# Altium PCB SOM_Codec_WM8731.PcbDoc (part 2 of 2)
Units mm, origin at the board's own origin, x right, y up, seen from the top; angles counter-clockwise.
Board outline 137 x 91.68 mm, 4 copper layers (Top Layer, Mid-Layer 1, Mid-Layer 3, Bottom Layer); 135 components, 119 nets, 648 pads, 240 vias.
Unrouted connection lines stored in the file: 116.
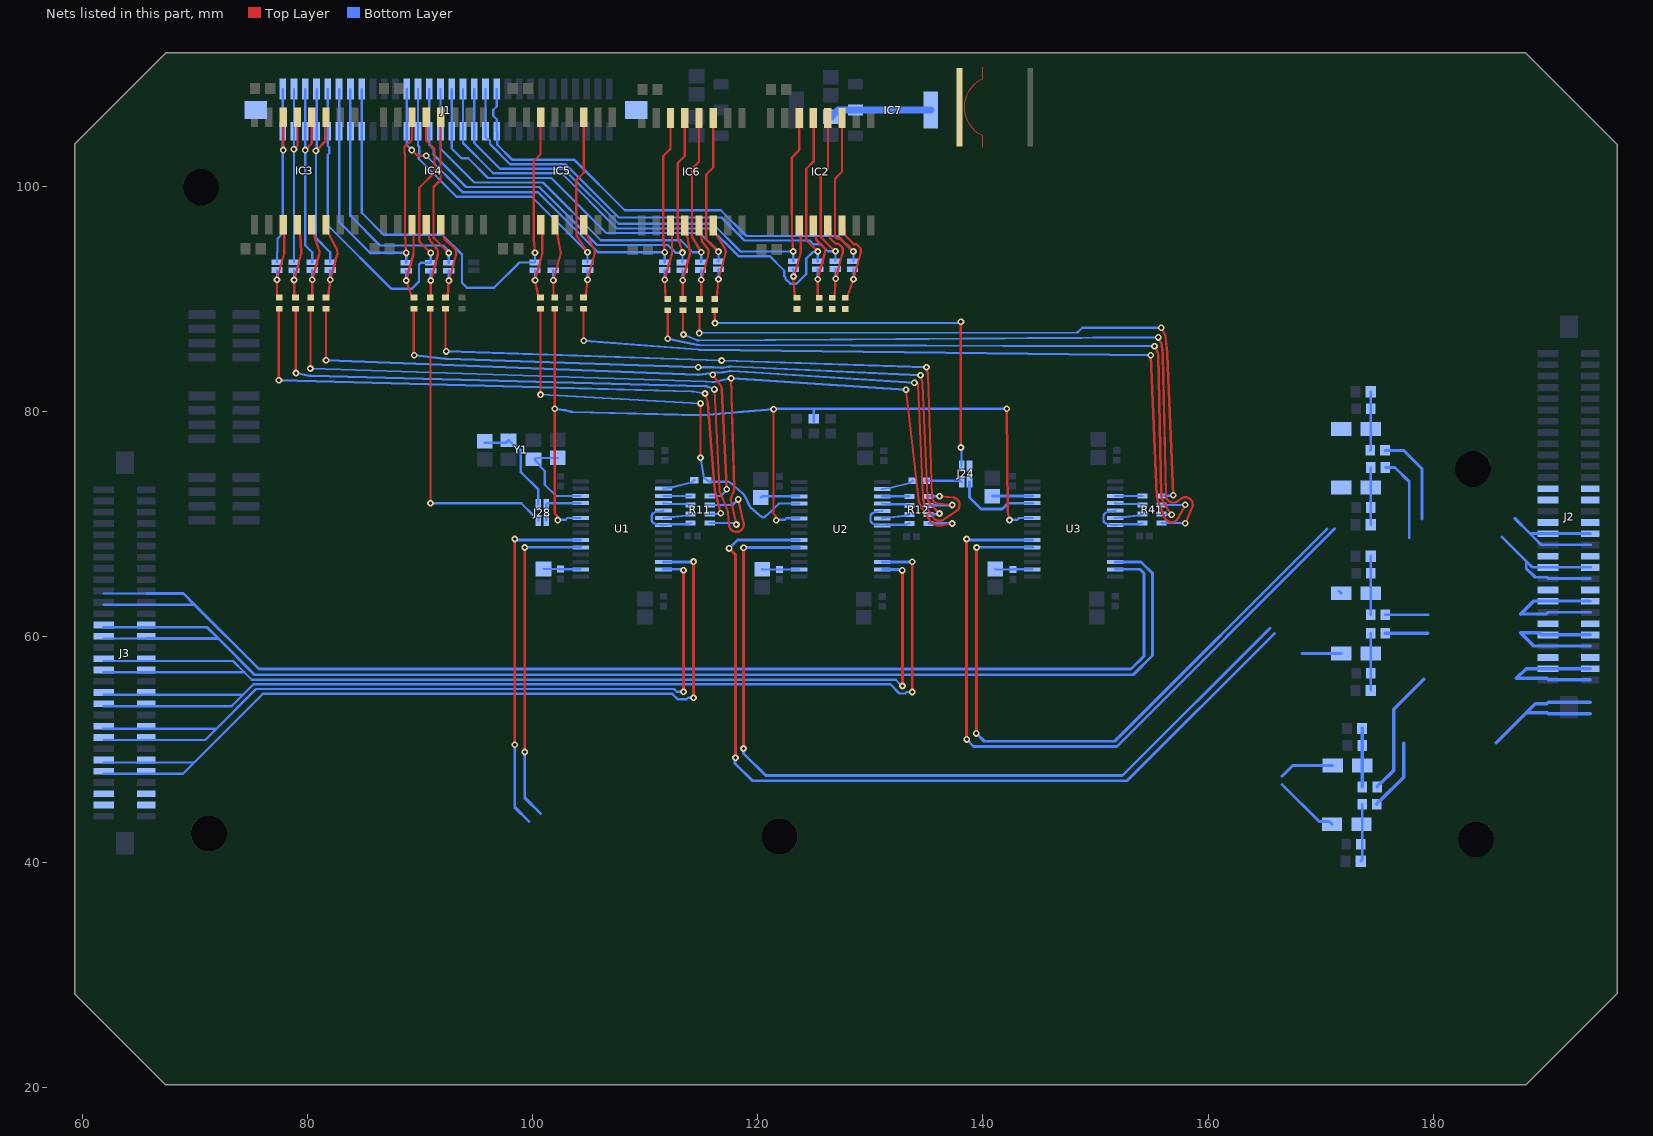
[diagram p2: the nets of this part, all layers, seen from the top]

## Via types
v1: diameter 0.6, hole 0.3, Top Layer to Bottom Layer, tented both sides, 238 vias
v2: diameter 0.6, hole 0.3, Top Layer to Bottom Layer, 2 vias

## Nets (pads, with @x,y where several pads share a name; then routed paths per layer and width w, separated by ;. In a path a pad name is that pad's centre, name@x,y a point inside that pad or via, vN(x,y) a via of type N, cw(c..) or ccw(c..) an arc to the next point about the centre after c; other vN are vias at no path point) (continued)
I2C1_SDA_: R17.2 R31.2 U1.23 U2.23 U3.23 | length 86.5
  Top Layer w0.203: R31.2@101.981,89.154 101.981,70.98 102.182,70.779 102.182,70.436 v1(102.235,70.383) ; v1(121.412,80.239) 121.412,70.955 121.613,70.754 121.613,70.411 v1(121.649,70.375) ; v1(142.113,80.264) 142.219,71.138 ccw(c142.875,71.145) 142.234,71.009 v1(142.367,70.383) v1@142.314,70.436
  Bottom Layer w0.203: v1(101.981,80.264) 102.829,80.152 cw(c102.743,79.502) 102.905,80.137 103.405,80.01 ccw(c103.567,80.645) 103.549,79.99 114.889,79.688 ccw(c114.918,80.749) 115.007,79.691 121.364,80.229 ccw(c121.347,80.431) v1(121.412,80.239) 121.455,80.253 cw(c121.52,80.061) 121.519,80.264 125.095,80.264 ; v1(102.235,70.383) 102.268,70.417 102.941,70.417 103.086,70.561 U1.23@104.267,70.561 ; v1(121.649,70.375) 121.701,70.427 122.408,70.427 122.517,70.536 U2.23@123.698,70.536 ; R17.2@124.968,79.121 124.976,79.698 124.976,80.061 cw(c125.179,80.061) 125.035,80.204 125.095,80.264 ; v1(142.113,80.264) 125.095,80.264 ; v1(142.367,70.383) 142.4,70.417 143.073,70.417 143.218,70.561 U3.23@144.399,70.561
I2C1_SDA_i: IC5.12 J19.2 R31.1 | length 7.5
  Top Layer w0.203: R31.1@101.981,90.154 101.853,90.302 v1(101.853,91.689) cw(c102.056,91.689) 101.86,91.743 102.475,93.964 ccw(c101.843,94.139) 102.488,94.256 102.245,95.596 cw(c102.844,95.705) 102.236,95.666 102.224,95.849 IC5.12@102.001,96.622
  Bottom Layer w0.203: v1@101.848,91.694 J19.2@101.848,92.564
I2S3_CK: IC6.4 J1.29 J1.30 J6.1 | length 45.6
  Top Layer w0.203: IC6.4@114.789,106.101 114.789,102.216 114.159,101.586 114.159,95.631 ccw(c114.362,95.631) 114.187,95.527 v1(114.987,94.172)
  Bottom Layer w0.203: J1.29@91.82,108.682 J1.30@91.82,104.932 91.82,103.379 94.828,100.371 100.924,100.371 106.061,95.234 113.159,95.234 114.221,94.172 v1(114.987,94.172) ; J6.1@114.992,93.297 v1@114.992,94.167
I2S3_CK_: R34.2 R41.5 | length 59.3
  Top Layer w0.203: v1(114.808,86.995) 114.822,87.009 R34.2@114.822,89.025 ; v1(155.844,87.46) 156.143,86.941 cw(c155.575,86.614) 156.227,86.682 156.382,85.187 cw(c154.921,85.036) 156.388,85.098 v1(156.916,72.588)
  Bottom Layer w0.203: v1(114.808,86.995) 148.335,87.044 ccw(c148.335,87.248) 148.478,87.104 148.835,87.46 v1(155.844,87.46) ; R41.5@155.878,72.517 155.913,72.552 156.88,72.552 v1(156.916,72.588)
I2S3_CK_i: IC6.13 J6.2 R34.1 | length 7.8
  Top Layer w0.203: IC6.13@114.789,96.551 115.012,95.778 115.012,95.41 ccw(c115.622,95.41) 115.143,95.033 115.502,94.578 cw(c114.987,94.172) 115.619,93.997 115.004,91.776 ccw(c115.2,91.722) v1(114.997,91.722) 114.997,90.173 R34.1@114.822,90.025
  Bottom Layer w0.203: J6.2@114.992,92.597 114.992,91.727 v1(114.997,91.722)
I2S3_MCK: IC6.3 J1.31 J1.32 J8.1 | length 46.2
  Top Layer w0.203: IC6.3@116.059,106.101 116.059,101.708 115.429,101.078 115.429,97.292 115.419,97.282 115.419,95.41 ccw(c115.622,95.41) 115.477,95.268 v1(116.511,94.234)
  Bottom Layer w0.203: J1.31@92.82,108.682 J1.32@92.82,104.932 92.82,103.395 93.686,102.529 94.298,102.529 96.05,100.777 101.661,100.777 106.553,95.885 114.86,95.885 v1(116.511,94.234) ; J8.1@116.516,93.359 v1@116.516,94.229
I2S3_MCK_: J24.2 R33.2 | length 35.9
  Top Layer w0.203: R33.2@116.177,89.025 116.177,87.912 v1(116.205,87.884) ; v1(138.049,76.835) v1(138.049,88.011)
  Bottom Layer w0.203: v1(116.205,87.884) 137.815,87.884 137.942,88.011 v1(138.049,88.011) ; v1(138.049,76.835) 138.111,76.773 J24.2@138.111,75.187
I2S3_MCK_i: IC6.14 J8.2 R33.1 | length 7.9
  Top Layer w0.203: IC6.14@116.059,96.551 116.282,95.778 117.059,94.594 cw(c116.511,94.234) 117.143,94.061 v1(116.521,91.784) ccw(c116.717,91.73) 116.515,91.748 116.375,90.173 R33.1@116.177,90.025
  Bottom Layer w0.203: v1@116.516,91.789 J8.2@116.516,92.659
I2S3_SDI: IC6.6 J1.23 J1.24 J7.1 | length 44.9
  Top Layer w0.203: v1(89.281,103.251) 89.789,102.743 v1(90.551,102.743) ; v1(111.736,94.172) 111.62,95.619 cw(c111.822,95.634) 111.619,95.634 111.619,102.729 112.249,103.359 IC6.6@112.249,106.101
  Bottom Layer w0.203: J1.23@88.82,108.682 J1.24@88.82,104.932 88.82,103.712 v1(89.281,103.251) ; v1(90.551,102.743) 93.777,99.517 100.462,99.517 105.807,94.172 v1(111.736,94.172) ; J7.1@111.741,93.297 v1@111.741,94.167
I2S3_SDI_: R36.2 R41.7 | length 62
  Top Layer w0.203: R36.2@112.012,89.025 112.012,86.489 v1(112.014,86.487) ; v1(155.248,85.825) 155.502,85.34 cw(c154.921,85.036) 155.577,85.049 155.854,72.564 ccw(c156.916,72.588) 156.021,72.016 v1(156.764,70.854)
  Bottom Layer w0.203: v1(112.014,86.487) 113.278,86.226 114.594,85.955 ccw(c114.808,86.995) 114.805,85.933 v1(155.248,85.825) ; R41.7@155.878,70.917 155.91,70.885 156.732,70.885 v1(156.764,70.854)
I2S3_SDI_i: IC6.11 J7.2 R36.1 | length 7.6
  Top Layer w0.203: R36.1@112.012,90.025 111.813,90.173 v1(111.746,91.722) 111.746,91.726 cw(c111.949,91.726) 111.753,91.781 112.368,93.997 ccw(c111.736,94.172) 112.392,94.172 112.392,95.778 IC6.11@112.249,96.551
  Bottom Layer w0.203: J7.2@111.741,92.597 111.741,91.727 v1(111.746,91.722)
I2S3_SDO: IC5.3 J1.25 J1.26 J4.1 | length 38.1
  Top Layer w0.203: IC5.3@104.541,106.172 104.541,101.239 103.886,100.584 103.886,97.638 103.901,97.623 103.901,95.715 ccw(c104.104,95.715) 103.934,95.604 v1(104.878,94.172)
  Bottom Layer w0.203: J1.25@89.82,108.682 J1.26@89.82,104.932 89.82,103.652 89.937,103.536 89.937,102.979 89.895,102.938 89.895,102.471 93.256,99.111 99.939,99.111 v1(104.878,94.172) ; J4.1@104.883,93.297 104.878,93.302 104.878,94.162 v1@104.883,94.167
I2S3_SDO_: R29.2 R41.6 | length 72.8
  Top Layer w0.203: R29.2@104.521,89.154 104.521,86.328 v1(104.542,86.307) ; v1(154.921,85.036) 155.449,72.526 ccw(c156.916,72.588) 155.562,72.018 156.159,70.599 ccw(c156.764,70.854) 157.342,70.545 v1(157.988,71.755)
  Bottom Layer w0.203: v1(104.542,86.307) 114.696,85.531 ccw(c114.808,86.995) 114.79,85.527 v1(154.921,85.036) ; R41.6@155.878,71.717 157.95,71.717 v1(157.988,71.755)
I2S3_SDO_i: IC5.14 J4.2 R29.1 | length 7.7
  Top Layer w0.203: R29.1@104.521,90.154 104.719,90.302 v1(104.888,91.722) cw(c105.09,91.698) 104.894,91.752 105.51,93.999 ccw(c104.878,94.172) 105.463,94.468 104.764,95.849 IC5.14@104.541,96.622
  Bottom Layer w0.203: v1@104.883,91.727 J4.2@104.883,92.597
I2S3_WS: IC6.5 J1.27 J1.28 J5.1 | length 44.9
  Top Layer w0.203: v1(113.324,94.142) 112.897,95.576 cw(c113.092,95.634) 112.889,95.634 112.889,102.094 113.519,102.724 IC6.5@113.519,106.101
  Bottom Layer w0.203: J1.27@90.82,108.682 90.82,103.722 91.207,103.336 91.207,102.849 94.092,99.964 100.59,99.964 105.726,94.828 112.008,94.828 112.693,94.142 v1(113.324,94.142) ; J5.1@113.329,93.267 v1@113.329,94.137
I2S3_WS_: R35.2 R41.8 | length 65.7
  Top Layer w0.203: R35.2@113.367,89.025 113.367,86.912 v1(113.411,86.868) ; v1(155.575,86.614) 155.829,86.129 cw(c155.248,85.825) 155.9,85.893 155.978,85.145 cw(c154.921,85.036) 155.983,85.06 156.26,72.573 ccw(c156.916,72.588) 157.312,72.065 157.592,72.278 cw(c157.988,71.755) 158.59,71.495 v1(157.988,70.104)
  Bottom Layer w0.203: v1(113.411,86.868) 114.555,86.39 ccw(c114.808,86.995) 114.812,86.339 v1(155.575,86.614) ; R41.8@155.878,70.117 157.975,70.117 v1(157.988,70.104)
I2S3_WS_i: IC6.12 J5.2 R35.1 | length 7.5
  Top Layer w0.203: R35.1@113.367,90.025 113.334,90.173 v1(113.334,91.692) cw(c113.537,91.692) 113.341,91.746 113.956,93.967 ccw(c113.324,94.142) 113.971,94.248 113.761,95.532 cw(c114.362,95.631) 113.754,95.592 113.742,95.778 IC6.12@113.519,96.551
  Bottom Layer w0.203: J5.2@113.329,92.567 113.329,91.697 v1(113.334,91.692)
I2S_CKIN: IC5.6 J1.15 J1.16 J16.1 | length 44.7
  Top Layer w0.203: v1(100.218,94.139) 100.102,95.351 cw(c100.304,95.369) 100.101,95.369 100.101,102.26 100.711,102.87 100.711,106.152 IC5.6@100.731,106.172
  Bottom Layer w0.203: J1.15@84.82,108.682 J1.16@84.82,104.932 84.82,97.679 86.77,95.729 91.983,95.729 93.729,93.983 93.729,91.462 94.158,91.033 96.608,91.033 98.839,93.264 J16.1@100.223,93.264 v1@100.223,94.134
I2S_CKIN_: R15.2 R32.2 TP1.1 U2.25 | length 39
  Top Layer w0.203: v1(100.711,81.534) 100.711,88.009 R32.2@100.711,89.154 ; v1(114.918,80.749) v1(114.923,75.931)
  Bottom Layer w0.203: v1(100.711,81.534) v1(114.918,80.749) ; v1(114.923,75.931) 115.237,74.112 R15.2@115.51,73.914 115.783,73.786 117.253,73.786 cw(c117.253,73.131) 117.69,73.619 118.708,72.709 cw(c118.271,72.22) 118.862,72.505 119.294,71.608 ccw(c119.569,71.74) 119.368,71.511 TP1.1@120.396,70.612 120.472,70.612 ccw(c120.472,70.815) 120.604,70.661 121.145,71.124 ccw(c121.013,71.278) 121.156,71.134 121.819,71.797 cw(c121.963,71.653) 121.963,71.857 U2.25@123.698,71.857
I2S_CKIN_i: IC5.11 J16.2 R32.1 | length 7.6
  Top Layer w0.203: R32.1@100.711,90.154 100.513,90.302 v1(100.228,91.689) 100.228,91.71 cw(c100.431,91.71) 100.235,91.764 100.849,93.963 ccw(c100.218,94.139) 100.874,94.139 100.874,95.849 IC5.11@100.731,96.622
  Bottom Layer w0.203: J16.2@100.223,92.564 100.223,91.694 v1(100.228,91.689)
I2S_CLKOUT2: J24.4 R16.2 | length 3.2
  Bottom Layer w0.203: R16.2@134.941,73.889 138.009,73.889 J24.4@138.111,73.787
LIN1: J2.3 J2.4 J2.5 J2.6 R1.1 | length 22
  Bottom Layer w0.305: R1.1@174.989,45.151 174.989,45.201 175.262,45.474 175.312,45.474 177.372,47.534 177.372,50.546 ; 185.598,50.604 188.265,53.271 ; 193.96,53.197 190.21,53.197 190.136,53.271 188.265,53.271 ; 193.96,54.197 190.21,54.197 190.088,54.075 189.07,54.075 188.265,53.271
LIN2: J2.15 J2.16 J2.17 J2.18 R2.1 | length 16.8
  Bottom Layer w0.305: R2.1@175.751,60.325 179.531,60.325 ; 193.96,59.197 190.21,59.197 188.943,59.197 187.757,60.383 189.399,60.383 189.585,60.197 190.21,60.197 193.96,60.197
LIN3: J2.27 J2.28 J2.29 J2.30 R37.1 | length 23.2
  Bottom Layer w0.254: R37.1@175.751,75.057 176.61,75.057 177.88,73.787 177.88,68.834 ; 186.106,68.892 188.329,66.669 ; 193.96,65.197 190.21,65.197 190.104,65.303 189.06,65.303 188.265,66.098 188.265,66.606 188.329,66.669 ; 193.96,66.197 190.21,66.197 188.801,66.197 188.329,66.669
LOUT1: J3.3 J3.4 J3.5 J3.6 U1.12 | length 78.4
  Top Layer w0.254: v1(114.3,54.61) v1(114.3,66.7)
  Bottom Layer w0.203: 61.92,47.86 65.67,47.86 68.942,47.86 69.942,48.86 ; 61.92,48.86 65.67,48.86 69.942,48.86 ; v1@114.275,66.675 v1(114.3,66.7) ; v1(114.3,54.61) 113.81,54.61 113.683,54.482 112.882,54.482 112.399,54.966 76.048,54.966 69.942,48.86
  Bottom Layer w0.254: U1.12@111.633,66.675 v1@114.275,66.675
LOUT2: J3.15 J3.16 J3.17 J3.18 U2.12 | length 99.6
  Top Layer w0.254: v1(133.731,55.118) v1(133.731,66.675)
  Bottom Layer w0.203: 61.92,53.86 65.67,53.86 73.291,53.86 74.291,54.86 ; 61.92,54.86 65.67,54.86 74.291,54.86 ; v1@133.706,66.65 v1(133.731,66.675) ; v1(133.731,55.118) 133.261,55.118 133.116,54.973 132.606,54.973 131.785,55.794 75.225,55.794 74.291,54.86
  Bottom Layer w0.254: U2.12@131.064,66.65 v1@133.706,66.65
LOUT3: J3.27 J3.28 J3.29 J3.30 U3.12 | length 116.8
  Bottom Layer w0.203: 61.92,59.86 65.67,59.86 ; 61.92,60.86 65.67,60.86
  Bottom Layer w0.254: 65.67,59.86 72.093,59.86 ; 65.67,60.86 71.093,60.86 72.093,59.86 ; U3.12@151.765,66.675 154.051,66.675 155.067,65.659 155.067,58.359 153.357,56.649 75.304,56.649 72.093,59.86
NetC13_1: C13.1 U1.20 | length 37.4
  Top Layer w0.254: v1(98.425,50.419) v1(98.425,68.707)
  Bottom Layer w0.254: v1(98.425,50.419) 98.425,44.874 99.692,43.607 ; v1(98.425,68.707) 98.519,68.707 98.595,68.631 U1.20@104.267,68.631 ; 166.577,46.909 169.89,43.596 170.799,43.596 C13.1@171.022,43.373
NetC13_2: C13.2 C17.2 R1.2 R3.2 | length 5.1
  Bottom Layer w0.203: C17.2@173.562,40.071 173.689,40.198 R1.2@173.689,45.151
NetC14_1: C14.1 U2.20 | length 83.4
  Top Layer w0.254: v1(117.458,67.871) 118.026,67.303 118.026,49.265 v1(118.028,49.263)
  Bottom Layer w0.254: v1(117.458,67.871) 118.193,68.605 U2.20@123.698,68.605 ; v1(118.028,49.263) 117.985,49.221 117.985,48.766 119.526,47.225 152.804,47.225 165.904,60.325 ; 168.355,58.547 C14.1@171.831,58.547
NetC14_2: C14.2 C18.2 R2.2 R4.2 | length 5.1
  Bottom Layer w0.203: C18.2@174.451,55.245 R4.2@174.451,56.769 C14.2@174.451,58.547 R2.2@174.451,60.325
NetC19_1: C19.1 U1.19 | length 34.1
  Top Layer w0.254: v1(99.314,49.784) v1(99.314,67.945)
  Bottom Layer w0.203: v1(99.314,67.945) v1@99.339,67.97
  Bottom Layer w0.254: v1(99.314,49.784) 99.314,45.72 100.711,44.323 ; v1@99.339,67.97 U1.19@104.267,67.97 ; 166.577,47.625 167.532,48.58 C19.1@171.069,48.58
NetC19_2: C19.2 C21.2 R5.2 R7.2 | length 5.2
  Bottom Layer w0.305: C21.2@173.689,51.882 173.719,51.852 R5.2@173.719,46.675
NetC20_1: C20.1 U2.19 | length 76.5
  Top Layer w0.203: v1(118.74,50.092) v1@118.745,50.097
  Top Layer w0.254: v1@118.745,50.097 v1(118.745,67.92)
  Bottom Layer w0.203: v1(118.745,67.92) v1@118.77,67.945
  Bottom Layer w0.254: v1(118.74,50.092) 118.753,50.079 118.753,49.649 120.719,47.683 152.394,47.683 165.494,60.782 ; v1@118.77,67.945 U2.19@123.698,67.945 ; C20.1@171.628,64.084 C20.1@171.831,63.881
NetC20_2: C20.2 C22.2 R6.2 R8.2 | length 5.2
  Bottom Layer w0.203: R6.2@174.451,61.976 C20.2@174.451,63.881 R8.2@174.451,65.659 C22.2@174.451,67.183
NetC25_2: C25.2 IC7.2 IC7.4 L1.2 | length 9.1
  Bottom Layer w0.635: C25.2@126.492,106.21 126.542,106.21 127.139,106.807 IC7.2@128.682,106.807 IC7.4@135.382,106.807
NetC27_1: C27.1 C28.1 U1.16 | length 3.3
  Bottom Layer w0.203: C28.1@100.965,66.04 C27.1@102.489,66.04 102.514,66.015 U1.16@104.267,66.015
NetC29_1: C29.1 C30.1 U2.16 | length 3.3
  Bottom Layer w0.203: C30.1@120.396,66.015 120.421,65.989 C29.1@121.945,65.989 U2.16@123.698,65.989
NetC31_1: C31.1 U2.26 | length 3.5
  Bottom Layer w0.203: C31.1@120.269,72.39 120.371,72.492 U2.26@123.698,72.492
NetC32_1: C32.1 J28.4 Y1.1 | length 9.1
  Bottom Layer w0.203: Y1.1@97.876,77.47 98.374,76.972 98.584,76.972 98.965,76.59 98.965,74.644 100.519,73.09 J28.4@100.519,71.755
  Bottom Layer w0.254: C32.1@95.758,77.254 97.66,77.254 Y1.1@97.876,77.47
NetC33_1: C33.1 U1.26 Y1.3 | length 8.3
  Bottom Layer w0.203: C33.1@102.235,75.908 100.314,75.908 100.176,75.77 100.674,75.272 100.674,75.172 101.092,74.754 101.092,73.533 102.108,72.517 U1.26@104.267,72.517
NetC45_1: C45.1 U3.20 | length 64.6
  Top Layer w0.254: v1(138.557,68.707) 138.557,50.91 v1(138.566,50.901)
  Bottom Layer w0.254: v1(138.557,68.707) 138.651,68.707 138.727,68.631 U3.20@144.399,68.631 ; v1@138.577,50.889 139.18,50.287 151.91,50.287 171.235,69.612
NetC45_2: C45.2 C47.2 R37.2 R38.2 | length 5.1
  Bottom Layer w0.203: C47.2@174.451,69.977 R38.2@174.451,71.501 C45.2@174.451,73.279 R37.2@174.451,75.057
NetC48_1: C48.1 U3.19 | length 60.7
  Top Layer w0.203: v1(139.424,51.438) v1@139.45,51.463 ; v1(139.446,67.945) v1@139.45,67.941
  Top Layer w0.254: v1@139.45,51.463 v1@139.45,67.941
  Bottom Layer w0.203: v1(139.446,67.945) v1@139.471,67.97
  Bottom Layer w0.254: v1(139.424,51.438) 140.118,50.744 151.721,50.744 170.561,69.585 ; v1@139.471,67.97 U3.19@144.399,67.97
NetC48_2: C48.2 C49.2 R39.2 R40.2 | length 5.2
  Bottom Layer w0.203: R39.2@174.421,76.581 174.451,76.611 C48.2@174.451,78.486 R40.2@174.451,80.264 C49.2@174.451,81.788
NetC50_1: C50.1 C51.1 U3.16 | length 3.3
  Bottom Layer w0.203: C51.1@141.097,66.04 141.148,65.989 C50.1@142.672,65.989 ; C50.1@142.672,66.015 U3.16@144.399,66.015
NetC52_1: C52.1 U3.26 | length 3.6
  Bottom Layer w0.254: C52.1@140.843,72.517 U3.26@144.399,72.517
NetJ24_1: J24.1 J24.3 U3.25 | length 7.6
  Bottom Layer w0.254: J24.3@138.811,73.787 138.811,72.39 139.827,71.374 141.732,71.374 142.24,71.882 U3.25@144.399,71.882
NetJ28_1: J28.1 J28.3 U1.25 | length 4.5
  Bottom Layer w0.203: J28.1@101.219,70.355 J28.3@101.219,71.755 101.346,71.882 U1.25@104.267,71.882
NetR11_5: R11.5 U1.5 U1.7 | length 5.3
  Bottom Layer w0.203: U1.5@111.633,71.222 110.998,71.145 110.747,71.005 ccw(c110.896,70.739) 110.592,70.739 110.592,70.383 ccw(c110.896,70.383) 110.77,70.106 110.998,70.002 U1.7@111.633,69.926 112.268,70.002 113.698,70.002 R11.5@114.046,70.117
NetR11_6: R11.6 U1.6 | length 2.4
  Bottom Layer w0.203: U1.6@111.633,70.561 112.268,70.637 113.698,70.794 R11.6@114.046,70.917
NetR11_7: R11.7 U1.4 | length 2.4
  Bottom Layer w0.203: U1.4@111.633,71.882 112.268,71.806 113.698,71.806 R11.7@114.046,71.717
NetR11_8: R11.8 U1.3 | length 2.4
  Bottom Layer w0.203: U1.3@111.633,72.517 R11.8@114.046,72.517
NetR12_1: R12.1 U2.5 U2.7 | length 5.3
  Bottom Layer w0.203: U2.5@131.064,71.196 130.429,71.12 130.178,70.979 ccw(c130.327,70.714) 130.023,70.714 130.023,70.358 ccw(c130.327,70.358) 130.201,70.081 130.429,69.977 U2.7@131.064,69.901 131.699,69.977 133.129,69.977 R12.1@133.477,70.092
NetR12_2: R12.2 U2.6 | length 2.4
  Bottom Layer w0.203: U2.6@131.064,70.536 131.699,70.612 133.129,70.768 R12.2@133.477,70.892
NetR12_3: R12.3 U2.4 | length 2.4
  Bottom Layer w0.203: U2.4@131.064,71.857 131.699,71.78 133.129,71.78 R12.3@133.477,71.692
NetR12_4: R12.4 U2.3 | length 2.4
  Bottom Layer w0.203: U2.3@131.064,72.492 R12.4@133.477,72.492
NetR15_1: R15.1 U1.2 | length 2.9
  Bottom Layer w0.203: U1.2@111.633,73.177 112.268,73.254 114.087,73.716 R15.1@114.36,73.914
NetR16_1: R16.1 U2.2 | length 2.9
  Bottom Layer w0.203: U2.2@131.064,73.152 131.699,73.228 133.518,73.69 R16.1@133.791,73.889
NetR41_1: R41.1 U3.5 U3.7 | length 5.3
  Bottom Layer w0.203: U3.5@151.765,71.222 151.13,71.145 150.879,71.005 ccw(c151.028,70.739) 150.724,70.739 150.724,70.383 ccw(c151.028,70.383) 150.902,70.106 151.13,70.002 U3.7@151.765,69.926 152.4,70.002 153.83,70.002 R41.1@154.178,70.117
NetR41_2: R41.2 U3.6 | length 2.4
  Bottom Layer w0.203: U3.6@151.765,70.561 152.4,70.637 153.83,70.794 R41.2@154.178,70.917
NetR41_3: R41.3 U3.4 | length 2.4
  Bottom Layer w0.203: U3.4@151.765,71.882 152.4,71.806 153.83,71.806 R41.3@154.178,71.717
NetR41_4: R41.4 U3.3 | length 2.4
  Bottom Layer w0.203: U3.3@151.765,72.517 R41.4@154.178,72.517
RIN1: J2.9 J2.10 J2.11 J2.12 R5.1 | length 24.9
  Bottom Layer w0.305: R5.1@175.019,46.675 175.019,46.725 175.292,46.998 175.342,46.998 176.483,48.139 176.483,53.594 179.15,56.261 ; 193.96,56.197 190.21,56.197 190.088,56.319 187.376,56.319 188.254,57.197 190.21,57.197 193.96,57.197
RIN2: J2.21 J2.22 J2.23 J2.24 R6.1 | length 16.7
  Bottom Layer w0.254: R6.1@175.751,61.976 179.531,61.976 ; 187.757,62.034 190.047,62.034 190.21,62.197 193.96,62.197 ; 190.21,63.197 193.96,63.197
  Bottom Layer w0.305: 187.757,62.034 188.92,63.197 190.21,63.197
RIN3: J2.33 J2.34 J2.35 J2.36 R39.1 | length 21.5
  Bottom Layer w0.254: R39.1@175.721,76.581 177.372,76.581 179.023,74.93 179.023,70.485 ; 187.249,70.543 188.595,69.197 ; 193.96,68.197 190.21,68.197 189.585,68.197 189.412,68.37 189.412,68.38 188.595,69.197 ; 193.96,69.197 190.21,69.197 188.595,69.197
ROUT1: J3.9 J3.10 J3.11 J3.12 U1.13 | length 76.1
  Top Layer w0.254: v1(113.411,55.138) v1(113.411,65.938)
  Bottom Layer w0.203: 61.92,50.86 65.67,50.86 70.926,50.86 71.926,51.86 ; 61.92,51.86 65.67,51.86 71.926,51.86 ; v1@113.227,66.015 113.304,65.938 v1(113.411,65.938) ; v1(113.411,55.138) 112.801,55.138 112.567,55.372 75.438,55.372 71.926,51.86
  Bottom Layer w0.254: U1.13@111.633,66.015 v1@113.227,66.015
ROUT2: J3.21 J3.22 J3.23 J3.24 U2.13 | length 96.4
  Top Layer w0.203: v1(132.842,65.913) v1@132.853,65.902 ; v1@132.853,55.653 v1(132.864,55.642)
  Top Layer w0.254: v1@132.853,55.653 v1@132.853,65.902
  Bottom Layer w0.203: 61.92,56.86 65.67,56.86 74.397,56.86 ; 61.92,57.86 65.67,57.86 73.397,57.86 74.397,56.86 ; v1@132.658,65.989 132.735,65.913 v1(132.842,65.913) ; v1(132.864,55.642) 132.826,55.642 132.268,56.2 75.057,56.2 74.397,56.86
  Bottom Layer w0.254: U2.13@131.064,65.989 v1@132.658,65.989
ROUT3: J3.33 J3.34 J3.35 J3.36 U3.13 | length 113.8
  Bottom Layer w0.203: 61.92,62.86 65.67,62.86 ; 61.92,63.86 65.67,63.86
  Bottom Layer w0.254: 65.67,62.86 69.982,62.86 ; 65.67,63.86 68.982,63.86 69.982,62.86 ; U3.13@151.765,66.015 153.949,66.015 154.305,65.659 154.305,58.293 153.162,57.15 75.692,57.15 69.982,62.86
SAI1_FS: IC3.4 J1.5 J1.6 J11.1 | length 18.8
  Top Layer w0.203: v1(79.811,103.248) 80.391,103.828 IC3.4@80.391,106.172
  Bottom Layer w0.203: J1.5@79.82,108.682 79.82,103.257 v1(79.811,103.248) 79.811,94.779 80.418,94.172 ; J11.1@80.423,93.297 80.423,94.167
SAI1_FS_: R11.4 R12.8 R22.2 | length 89.7
  Top Layer w0.203: v1@80.282,83.867 80.282,89.13 R22.2@80.306,89.154 ; v1(117.635,82.975) 117.909,73.149 cw(c117.253,73.131) 117.845,72.848 117.68,72.503 ccw(c118.271,72.22) 117.632,72.074 v1(118.11,69.993) ; v1(133.177,81.959) 134.281,72.279 ccw(c136.144,72.492) 134.558,71.492 135.246,70.401 ccw(c136.144,70.968) 136.316,69.92 v1(137.287,70.079)
  Bottom Layer w0.203: v1(80.269,83.854) 115.358,82.688 cw(c115.322,81.627) 115.397,82.686 115.951,82.647 ccw(c115.997,83.301) 116.132,82.659 v1(117.635,82.975) 117.656,82.975 cw(c117.656,82.772) 117.67,82.975 v1(133.177,81.959) ; R11.4@115.746,70.117 v1@117.878,70.117 ; R12.8@135.177,70.092 137.274,70.092 v1(137.287,70.079)
SAI1_FS_i: IC3.13 J11.2 R22.1 | length 7.6
  Top Layer w0.203: R22.1@80.306,90.154 80.428,90.302 v1(80.428,91.722) cw(c80.631,91.722) 80.435,91.776 81.05,93.997 ccw(c80.418,94.172) 81.039,94.382 80.657,95.509 cw(c81.234,95.705) 80.626,95.666 80.614,95.849 IC3.13@80.391,96.622
  Bottom Layer w0.203: J11.2@80.423,92.597 80.423,91.727 v1(80.428,91.722)
SAI1_MCLK: IC4.5 J1.9 J1.10 J13.1 | length 39.8
  Top Layer w0.203: IC4.5@90.571,106.172 90.551,106.152 90.551,104.081 91.288,103.345 91.288,101.266 89.931,99.909 89.931,95.23 ccw(c90.134,95.23) 89.989,95.088 v1(90.957,94.12)
  Bottom Layer w0.203: J1.9@81.82,108.682 J1.10@81.82,104.932 81.82,103.638 81.936,103.523 81.936,102.979 81.82,102.864 81.82,96.583 87.48,90.923 89.272,90.923 89.916,91.567 89.916,93.091 90.07,93.245 J13.1@90.962,93.245 v1@90.962,94.115
SAI1_MCLK_: J28.2 R27.2 | length 27.6
  Top Layer w0.203: R27.2@90.916,89.154 90.932,89.138 v1(90.932,71.882)
  Bottom Layer w0.203: v1(90.932,71.882) 98.992,71.882 100.132,70.742 100.371,70.742 100.519,70.594 J28.2@100.519,70.355
SAI1_MCLK_i: IC4.12 J13.2 R27.1 | length 7.7
  Top Layer w0.203: IC4.12@90.571,96.622 90.794,95.849 90.794,95.552 ccw(c91.404,95.552) 90.938,95.159 91.458,94.543 cw(c90.957,94.12) 91.589,93.945 90.974,91.724 ccw(c91.17,91.67) v1(90.967,91.67) 90.967,90.302 R27.1@90.916,90.154
  Bottom Layer w0.203: J13.2@90.962,92.545 90.962,91.675 v1(90.967,91.67)
SAI1_SCK: IC3.3 J1.7 J1.8 J12.1 | length 19.3
  Top Layer w0.203: v1(80.757,103.189) 81.661,104.093 IC3.3@81.661,106.172
  Bottom Layer w0.203: v1(80.757,103.189) 80.757,95.433 82.018,94.172 ; v1@80.82,103.189 J1.8@80.82,104.932 J1.7@80.82,108.682 ; J12.1@82.023,93.297 82.023,94.167
SAI1_SCK_: R11.1 R12.5 R21.2 | length 87.9
  Top Layer w0.203: v1(81.661,84.582) 81.661,86.868 R21.2@81.661,89.154 ; v1(115.997,83.301) 116.681,82.38 cw(c116.154,81.99) 116.809,82.022 v1(117.253,73.131) ; 134.236,82.455 134.677,72.427 ccw(c136.144,72.492) 134.902,71.708 135.589,70.618 ccw(c136.144,70.968) 136.508,70.422 137.651,71.184 ccw(c137.287,71.73) 137.346,72.383 v1(136.144,72.492)
  Bottom Layer w0.203: v1(81.661,84.582) 114.686,83.295 ccw(c114.712,83.95) 114.79,83.299 115.788,83.418 cw(c115.812,83.217) v1(115.997,83.301) ; R11.1@115.746,72.517 116.713,72.517 117.253,73.057 v1(117.253,73.131) ; v1(133.92,82.588) 117.677,83.63 ccw(c117.635,82.975) 117.503,83.618 117.007,83.517 cw(c116.796,84.558) 116.843,83.497 116.188,83.468 ccw(c116.197,83.265) v1(115.997,83.301) ; R12.5@135.177,72.492 v1(136.144,72.492) ; v1(115.997,83.301) v1@115.997,83.42 ; v1(115.997,83.301) v1@115.997,83.42 ; v1(115.997,83.301) v1@115.997,83.42
SAI1_SCK_i: IC3.14 J12.2 R21.1 | length 7.8
  Top Layer w0.203: R21.1@81.661,90.154 81.859,90.302 82.027,91.698 ccw(c81.825,91.722) v1(82.028,91.722) cw(c82.231,91.722) 82.035,91.776 82.65,93.997 ccw(c82.018,94.172) 82.6,94.475 81.884,95.849 IC3.14@81.661,96.622
  Bottom Layer w0.203: J12.2@82.023,92.597 82.023,91.727 v1(82.028,91.722)
SAI1_SD_A: IC3.6 J1.1 J1.2 J9.1 | length 18.5
  Top Layer w0.203: v1(77.851,103.251) IC3.6@77.851,106.172
  Bottom Layer w0.203: 77.294,94.172 77.343,94.221 77.343,95.377 77.82,95.854 J1.2@77.82,104.932 J1.1@77.82,108.682 ; J9.1@77.299,93.297 77.299,94.167
SAI1_SD_A_: R11.3 R24.2 | length 56
  Top Layer w0.203: v1@77.459,82.815 77.459,89.117 R24.2@77.496,89.154 ; v1(115.322,81.627) 115.541,80.951 cw(c114.918,80.749) 115.571,80.802 116.195,73.046 ccw(c117.253,73.131) 116.226,72.863 v1(116.713,70.993)
  Bottom Layer w0.203: v1(77.47,82.804) 100.729,82.189 cw(c100.711,81.534) 100.731,82.189 114.193,81.813 cw(c114.176,81.204) 114.278,81.805 v1(115.322,81.627) ; R11.3@115.746,70.917 116.53,70.917 116.606,70.993 v1(116.713,70.993)
SAI1_SD_A_i: IC3.11 J9.2 R24.1 | length 7.5
  Top Layer w0.203: R24.1@77.496,90.154 77.304,90.302 v1(77.304,91.722) cw(c77.507,91.722) 77.311,91.776 77.926,93.997 ccw(c77.294,94.172) 77.95,94.172 77.95,95.849 IC3.11@77.851,96.622
  Bottom Layer w0.203: J9.2@77.299,92.597 77.299,91.727 v1(77.304,91.722)
SAI1_SD_B: IC3.5 J1.3 J1.4 J10.1 | length 18.4
  Top Layer w0.203: v1(78.805,103.317) 78.805,103.319 79.121,103.634 IC3.5@79.121,106.172
  Bottom Layer w0.203: 78.813,94.158 78.82,94.165 78.82,103.302 v1(78.805,103.317) 78.82,103.332 J1.3@78.82,108.682 ; J10.1@78.818,93.283 78.818,94.153
SAI1_SD_B_: R11.2 R23.2 | length 62.2
  Top Layer w0.203: R23.2@78.951,89.154 78.976,89.129 78.976,83.457 v1(78.994,83.439) ; v1(116.154,81.99) 116.599,73.098 ccw(c117.253,73.131) 116.647,72.882 117.32,71.242 cw(c116.713,70.993) 117.366,71.046 117.457,69.94 ccw(c118.11,69.993) 118.749,70.139 v1(118.271,72.22)
  Bottom Layer w0.203: v1(78.994,83.439) 80.141,83.211 ccw(c80.269,83.854) 80.252,83.198 115.339,82.282 cw(c115.322,81.627) 115.575,82.232 v1(116.154,81.99) ; R11.2@115.746,71.717 117.768,71.717 v1(118.271,72.22)
SAI1_SD_B_i: IC3.12 J10.2 R23.1 | length 7.5
  Top Layer w0.203: R23.1@78.951,90.154 78.823,90.302 v1(78.823,91.708) cw(c79.026,91.708) 78.83,91.762 79.445,93.983 ccw(c78.813,94.158) 79.467,94.208 79.357,95.659 cw(c79.964,95.705) 79.356,95.666 79.344,95.849 IC3.12@79.121,96.622
  Bottom Layer w0.203: v1@78.818,91.713 J10.2@78.818,92.583
SAI2_SD_A: IC4.6 J1.11 J1.12 J14.1 | length 32.1
  Top Layer w0.203: v1(88.773,94.12) 88.672,95.693 cw(c88.874,95.705) 88.671,95.705 88.671,102.934 88.625,102.979 88.625,103.523 89.009,103.907 89.048,103.907 89.301,104.16 IC4.6@89.301,106.172
  Bottom Layer w0.203: J1.11@82.82,108.682 J1.12@82.82,104.932 82.82,96.885 85.585,94.12 v1(88.773,94.12) ; J14.1@88.778,93.245 v1@88.778,94.115
SAI2_SD_A_: R12.7 R28.2 | length 62.7
  Top Layer w0.203: R28.2@89.461,89.154 89.461,85.049 v1(89.483,85.027) ; v1(134.464,83.246) 134.631,82.55 cw(c134.236,82.455) 134.642,82.473 135.083,72.445 ccw(c136.144,72.492) 135.382,71.752 v1(136.144,70.968)
  Bottom Layer w0.203: v1(89.483,85.027) 92.256,84.718 ccw(c92.329,85.369) 92.305,84.714 114.706,83.95 ccw(c114.712,84.153) v1(114.712,83.95) 115.994,83.956 cw(c115.997,83.301) 116.044,83.955 116.749,83.904 ccw(c116.796,84.558) 116.927,83.915 117.424,84.016 cw(c117.635,82.975) 117.685,84.036 v1(134.464,83.246) ; R12.7@135.177,70.892 v1@135.961,70.892
SAI2_SD_A_i: IC4.11 J14.2 R28.1 | length 7.6
  Top Layer w0.203: IC4.11@89.301,96.622 89.429,95.849 89.429,94.12 cw(c88.773,94.12) 89.405,93.945 88.79,91.724 ccw(c88.986,91.67) v1(88.783,91.67) v1(88.783,91.67) ccw(c88.986,91.67) 88.795,91.601 89.263,90.302 R28.1@89.461,90.154
  Bottom Layer w0.203: J14.2@88.778,92.545 88.778,91.675 v1(88.783,91.67)
SAI2_SD_B: IC4.4 J1.13 J1.14 J15.1 | length 35.4
  Top Layer w0.203: IC4.4@91.832,106.163 91.832,100.595 91.201,99.964 91.201,95.552 ccw(c91.404,95.552) 91.259,95.41 v1(92.559,94.11)
  Bottom Layer w0.203: J1.13@83.82,108.682 J1.14@83.82,104.932 83.82,97.409 86.453,94.776 92.041,94.776 92.707,94.11 v1(92.559,94.11) ; J15.1@92.564,93.235 v1@92.564,94.105
SAI2_SD_B_: R12.6 R26.2 | length 62.3
  Top Layer w0.203: R26.2@92.271,89.154 92.271,85.427 v1(92.329,85.369) ; v1@116.796,84.529 v1(116.796,84.558) ; v1(134.998,83.95) 135.108,83.368 cw(c134.464,83.246) 135.119,83.268 135.489,72.469 ccw(c136.144,72.492) 136.085,71.839 v1(137.287,71.73)
  Bottom Layer w0.203: v1(92.329,85.369) v1(116.796,84.558) v1(134.998,83.95) ; R12.6@135.177,71.692 137.249,71.692 v1(137.287,71.73)
SAI2_SD_B_i: IC4.13 J15.2 R26.1 | length 8
  Top Layer w0.203: IC4.13@91.841,96.622 92.064,95.849 92.064,95.715 ccw(c92.674,95.715) 92.242,95.285 92.284,95.244 ccw(c92.786,95.747) 92.309,95.219 92.999,94.596 cw(c92.559,94.11) 93.191,93.936 92.576,91.699 ccw(c92.772,91.645) v1(92.569,91.66) 92.469,90.302 R26.1@92.271,90.154
  Bottom Layer w0.203: J15.2@92.564,92.535 92.564,91.665 v1(92.569,91.66)
SPI2_MISO: IC2.6 J1.35 J1.36 J22.1 | length 50.2
  Top Layer w0.203: v1(123.166,94.237) 123.039,95.782 123.039,95.799 123.039,97.552 123.036,97.555 123.036,102.589 123.698,103.251 123.698,106.082 IC2.6@123.679,106.101
  Bottom Layer w0.203: J1.35@94.82,108.682 94.82,103.884 97.114,101.59 102.756,101.59 107.649,96.698 116.007,96.698 118.468,94.237 v1(123.166,94.237) ; J22.1@123.171,93.362 123.166,93.367 123.166,94.227 v1@123.171,94.232
SPI2_MISO_: R20.2
SPI2_MISO_i: IC2.11 J22.2 R20.1 | length 7.3
  Top Layer w0.203: v1(123.176,92.023) 123.19,92.009 v1@123.228,92.009 ; R20.1@123.486,90.139 123.288,90.287 123.176,91.787 123.176,91.795 cw(c123.379,91.795) 123.183,91.849 v1@123.228,92.009 ; IC2.11@123.679,96.551 123.822,95.778 123.822,94.237 cw(c123.166,94.237) 123.798,94.062 v1@123.228,92.009
  Bottom Layer w0.203: J22.2@123.171,92.662 123.176,92.657 v1(123.176,92.023)
SPI2_MOSI: IC2.5 J1.33 J1.34 J21.1 | length 57.3
  Top Layer w0.203: IC2.5@124.949,106.101 124.968,106.082 124.968,102.235 124.319,101.586 124.319,95.243 v1(125.325,94.237)
  Bottom Layer w0.203: J1.33@93.82,108.682 93.82,103.884 96.52,101.184 102.588,101.184 107.48,96.291 115.839,96.291 118.3,93.831 121.072,93.831 122.366,92.536 122.366,92.046 122.465,91.947 122.465,91.806 122.904,91.367 123.448,91.367 124.321,92.241 124.321,93.616 124.909,94.204 125.292,94.204 v1(125.325,94.237) ; J21.1@125.33,93.362 125.325,93.367 125.325,94.227 v1@125.33,94.232
SPI2_MOSI_: R19.2
SPI2_MOSI_i: IC2.12 J21.2 R19.1 | length 6.8
  Top Layer w0.203: 125.184,95.595 125.184,95.305 125.976,94.513 125.976,94.317 cw(c125.325,94.237) 125.957,94.062 125.342,91.841 ccw(c125.538,91.787) v1(125.335,91.787) 125.335,90.287 R19.1@125.476,90.139
  Bottom Layer w0.203: v1@125.33,91.792 J21.2@125.33,92.662
SPI2_NSS: IC2.3 J1.39 J1.40 J20.1 | length 54.7
  Top Layer w0.203: IC2.3@127.489,106.101 127.489,101.327 126.859,100.697 126.859,95.634 ccw(c127.062,95.634) 126.861,95.608 126.869,95.6 126.869,95.54 127.038,95.371 127.366,95.371 v1(128.5,94.237)
  Bottom Layer w0.203: J1.39@96.82,108.682 96.82,107.126 96.518,106.825 96.518,106.281 96.82,105.98 J1.40@96.82,104.932 96.866,104.886 96.866,103.714 98.177,102.403 103.68,102.403 108.186,97.896 116.72,97.896 118.995,95.621 127.116,95.621 v1(128.5,94.237) ; J20.1@128.505,93.362 v1@128.505,94.232
SPI2_NSS_: R10.2
SPI2_NSS_i: IC2.14 J20.2 R10.1 | length 8.4
  Top Layer w0.203: IC2.14@127.489,96.551 127.712,96.328 127.712,95.723 128.543,94.893 128.772,94.893 129.156,94.509 129.156,94.087 129.132,94.064 v1(128.51,91.787) 127.984,90.287 R10.1@127.786,90.139
  Bottom Layer w0.203: J20.2@128.505,92.662 128.505,91.792 v1(128.51,91.787)
SPI2_SCK: IC2.4 J1.37 J1.38 J23.1 | length 53.3
  Top Layer w0.203: IC2.4@126.219,106.101 126.238,106.082 126.238,101.6 125.589,100.951 125.589,95.634 125.59,95.633 125.59,95.549 126.873,94.266 v1(126.913,94.266)
  Bottom Layer w0.203: J1.37@95.82,108.682 95.82,104.407 96.018,104.209 96.096,104.209 96.215,104.09 96.215,103.79 98.009,101.996 102.925,101.996 107.667,97.255 116.787,97.255 118.827,95.215 124.639,95.215 124.639,95.198 124.944,94.893 125.597,94.893 126.223,94.266 v1(126.913,94.266) ; J23.1@126.918,93.391 v1@126.918,94.261
SPI2_SCK_: R14.2
SPI2_SCK_i: IC2.13 J23.2 R14.1 | length 8.2
  Top Layer w0.203: IC2.13@126.219,96.551 126.442,96.328 126.442,95.392 126.869,94.965 126.929,94.965 126.972,94.922 127.185,94.922 127.546,94.56 127.514,94.528 cw(c126.913,94.266) 127.545,94.092 126.93,91.858 ccw(c127.126,91.804) v1(126.923,91.816) 126.829,90.287 R14.1@126.631,90.139
  Bottom Layer w0.203: J23.2@126.918,92.691 126.918,91.821 v1(126.923,91.816)
pads on no net: J25.1 J25.2 J25.3 J25.4 J25.5 J25.6 J25.7 J25.8 J26.1 J26.2 J26.3 J26.4 J26.5 J26.6 J26.7 J26.8 J27.1 J27.2 J27.3 J27.4 J27.5 J27.6 J27.7 J27.8 U1.9 U1.10 U1.17 U1.18 U2.9 U2.10 U2.17 U2.18 U3.2 U3.9 U3.10 U3.17 U3.18

## Polygon pours and split planes (outlines as drawn)
GND on Top Layer "NONET_L02_P-001" (solid, remove dead copper, pour order 0): 66.169,99.185 163.576,99.185 163.576,74.295 158.465,69.185 89.311,69.185 76.581,81.915 76.581,88.773
GND_A on Top Layer "NONET_L02_P-001" (solid, remove dead copper, pour order 2): 59.182,99.314 67.691,99.314 76.454,90.551 76.454,81.788 89.281,68.961 158.369,68.961 163.957,74.549 163.957,111.903 204.597,111.903 204.597,20.32 59.436,20.32
GND_MCU on Top Layer "NONET_L02_P-001" (solid, remove dead copper, pour order 5): 59.309,102.681 59.309,112.014 163.703,112.014 163.703,103.062
GND on Bottom Layer "NONET_L02_P-001" (solid, remove dead copper, pour order 1): 66.167,99.187 163.576,99.187 163.576,74.295 158.465,69.185 89.311,69.185 76.581,81.915 76.581,88.773
GND_A on Bottom Layer "NONET_L02_P-001" (solid, remove dead copper, pour order 3): 59.182,99.314 67.691,99.314 76.454,90.551 76.454,81.788 89.281,68.961 158.369,68.961 163.957,74.549 163.957,111.903 204.597,111.903 204.597,20.32 59.436,20.32
GND_MCU on Bottom Layer "NONET_L02_P-001" (solid, remove dead copper, pour order 4): 59.309,102.552 59.309,112.014 163.703,112.014 163.703,102.933

## Silkscreen, mask and mechanical layers (free items; w line width, h text height)
Top Overlay:
  lines w0.2: 68.943,97.199 72.118,102.699 ; 68.943,97.199 72.118,97.199 ; 68.943,97.199 68.518,97.936 67.355,99.949 68.943,102.699 ; 68.943,102.699 72.118,102.699 ; 68.943,102.699 72.118,97.199 ; 69.659,39.795 72.834,45.295 ; 69.659,39.795 72.834,39.795 ; 69.659,39.795 69.234,40.532 68.071,42.545 69.659,45.295 ; 69.659,45.295 72.834,45.295 ; 69.659,45.295 72.834,39.795 ; 72.118,97.199 73.706,99.949 72.118,102.699 ; 72.834,39.795 74.422,42.545 72.834,45.295 ; 120.362,39.529 119.936,40.266 118.774,42.279 120.362,45.029 ; 120.362,39.529 123.537,39.529 ; 120.362,39.529 123.537,45.029 ; 120.362,45.029 123.537,39.529 ; 120.362,45.029 123.537,45.029 ; 123.537,39.529 125.125,42.279 123.537,45.029 ; 181.968,72.187 181.542,72.924 180.38,74.937 181.968,77.687 ; 181.968,72.187 185.143,72.187 ; 181.968,72.187 185.143,77.687 ; 181.968,77.687 185.143,72.187 ; 181.968,77.687 185.143,77.687 ; 182.224,39.272 181.798,40.009 180.636,42.022 182.224,44.772 ; 182.224,39.272 185.399,39.272 ; 182.224,39.272 185.399,44.772 ; 182.224,44.772 185.399,39.272 ; 182.224,44.772 185.399,44.772 ; 185.143,72.187 186.731,74.937 185.143,77.687 ; 185.399,39.272 186.987,42.022 185.399,44.772
  text "XTAL" at 167.005,97.536 h1.52
  text "FILTER HEADER" at 167.063,95.062 h1.52
  text "+-12V POWER MODULES" at 167.132,92.71 h1.52
Bottom Overlay:
  lines w0.2: 68.943,97.199 72.118,97.199 ; 68.943,97.199 72.118,102.699 ; 68.943,97.199 68.518,97.935 67.355,99.949 68.943,102.699 ; 68.943,102.699 72.118,102.699 ; 68.943,102.699 72.118,97.199 ; 69.659,39.795 69.234,40.531 68.071,42.545 69.659,45.295 ; 69.659,39.795 72.834,39.795 ; 69.659,39.795 72.834,45.295 ; 69.659,45.295 72.834,39.795 ; 69.659,45.295 72.834,45.295 ; 72.118,97.199 73.706,99.949 72.118,102.699 ; 72.834,39.795 74.422,42.545 72.834,45.295 ; 120.362,39.529 123.537,45.029 ; 120.362,39.529 119.936,40.266 118.774,42.279 120.362,45.029 ; 120.362,39.529 123.537,39.529 ; 120.362,45.029 123.537,39.529 ; 120.362,45.029 123.537,45.029 ; 123.537,39.529 125.125,42.279 123.537,45.029 ; 181.968,72.186 185.143,77.686 ; 181.968,72.186 185.143,72.186 ; 181.968,72.186 181.542,72.923 180.38,74.936 181.968,77.686 ; 181.968,77.686 185.143,77.686 ; 181.968,77.686 185.143,72.186 ; 182.224,39.271 185.399,44.771 ; 182.224,39.271 185.399,39.271 ; 182.224,39.271 181.798,40.008 180.636,42.021 182.224,44.771 ; 182.224,44.771 185.399,44.771 ; 182.224,44.771 185.399,39.271 ; 185.143,72.186 186.731,74.936 185.143,77.686 ; 185.399,39.271 186.987,42.021 185.399,44.771
outline:
  the board outline again, w0.1
Mechanical 4:
  circle w0.013: c70.531,99.949 r1.6
  circle w0.013: c70.531,99.949 r1.6
  circle w0.013: c126.067,42.538 r1.6
  circle w0.013: c126.067,42.538 r1.6
  circle w0.013: c71.247,42.545 r1.6
  circle w0.013: c71.247,42.545 r1.6
  circle w0.013: c154.613,100.585 r1.6
  circle w0.013: c154.613,100.585 r1.6
  lines w0.013: 59.346,20.207 204.569,20.207 204.569,111.903 59.346,111.903 59.346,20.207 ; 67.41,16.704 191.235,16.704 191.235,103.256 67.41,103.256 67.41,16.704